# Altium PCB Layout.PcbDoc
Units mil, origin at the board's own origin, x right, y up, seen from the top; angles counter-clockwise.
Board outline 1780 x 2630 mil, 2 copper layers (Top Layer, Bottom Layer); 36 components, 22 nets, 112 pads, 25 vias.
Unrouted connection lines stored in the file: 1.
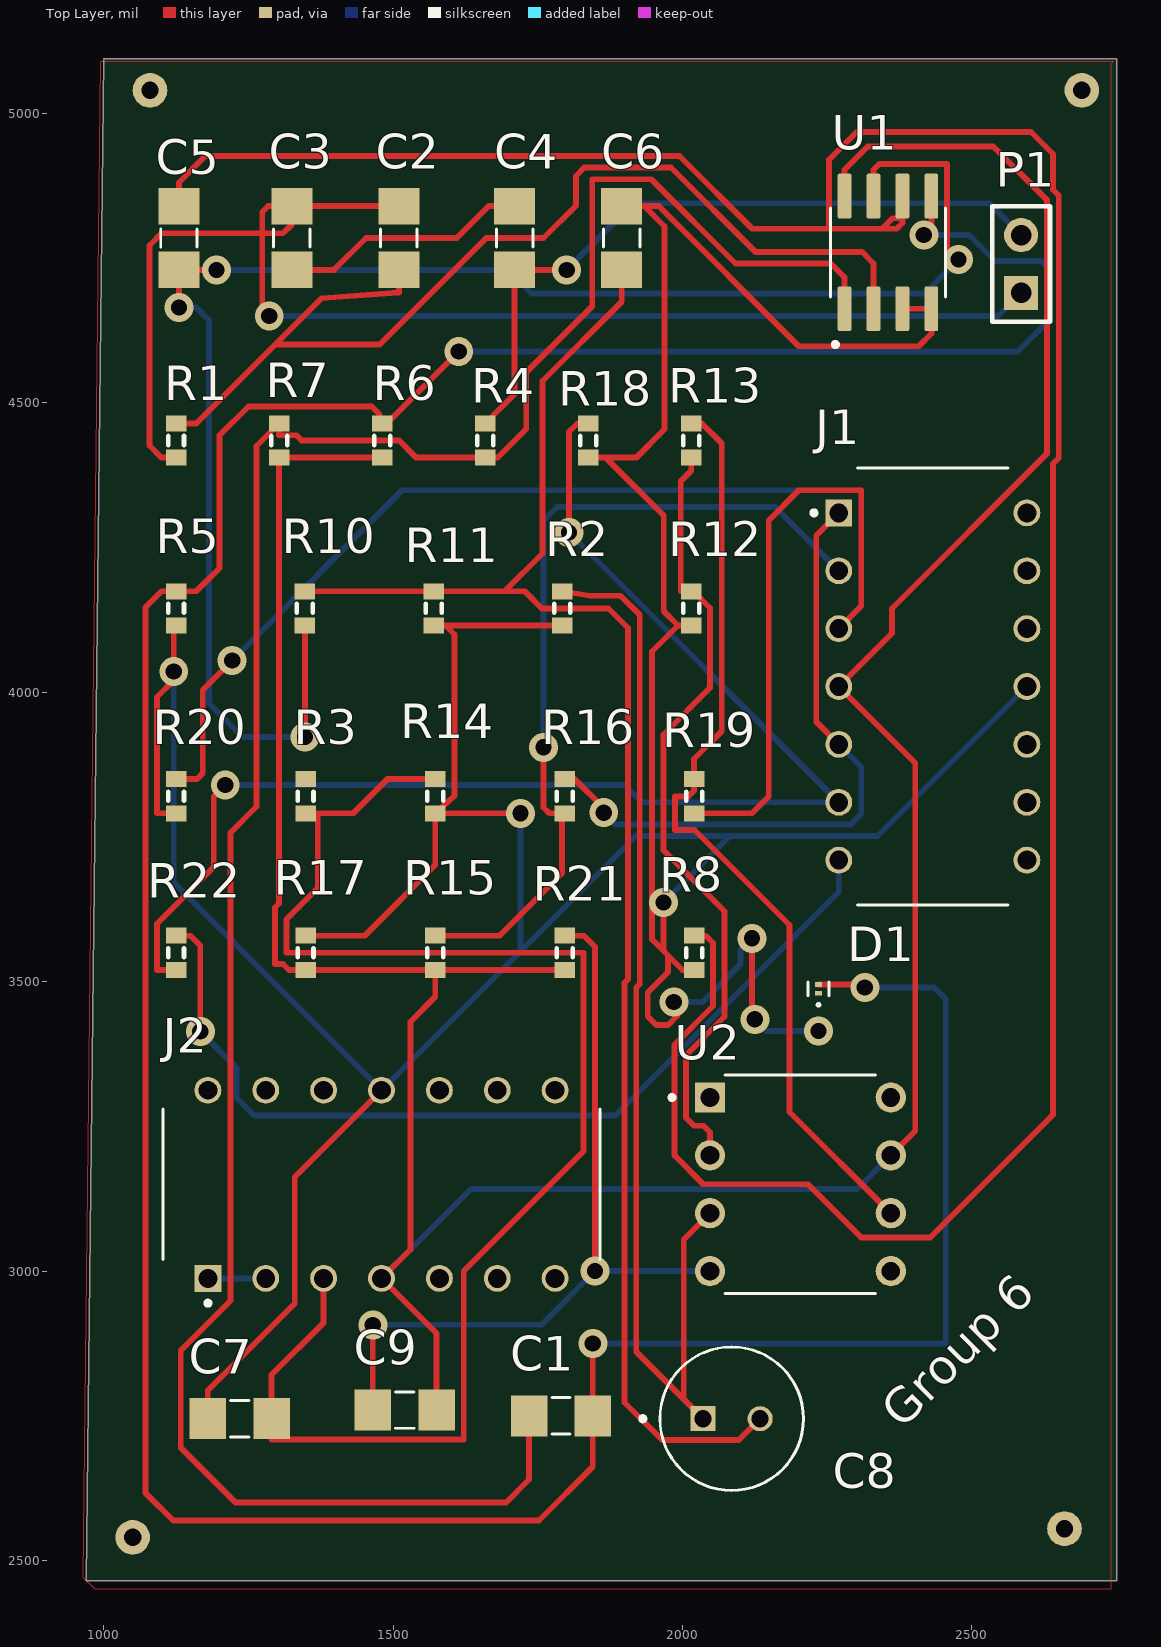
[diagram p0: Top Layer view]
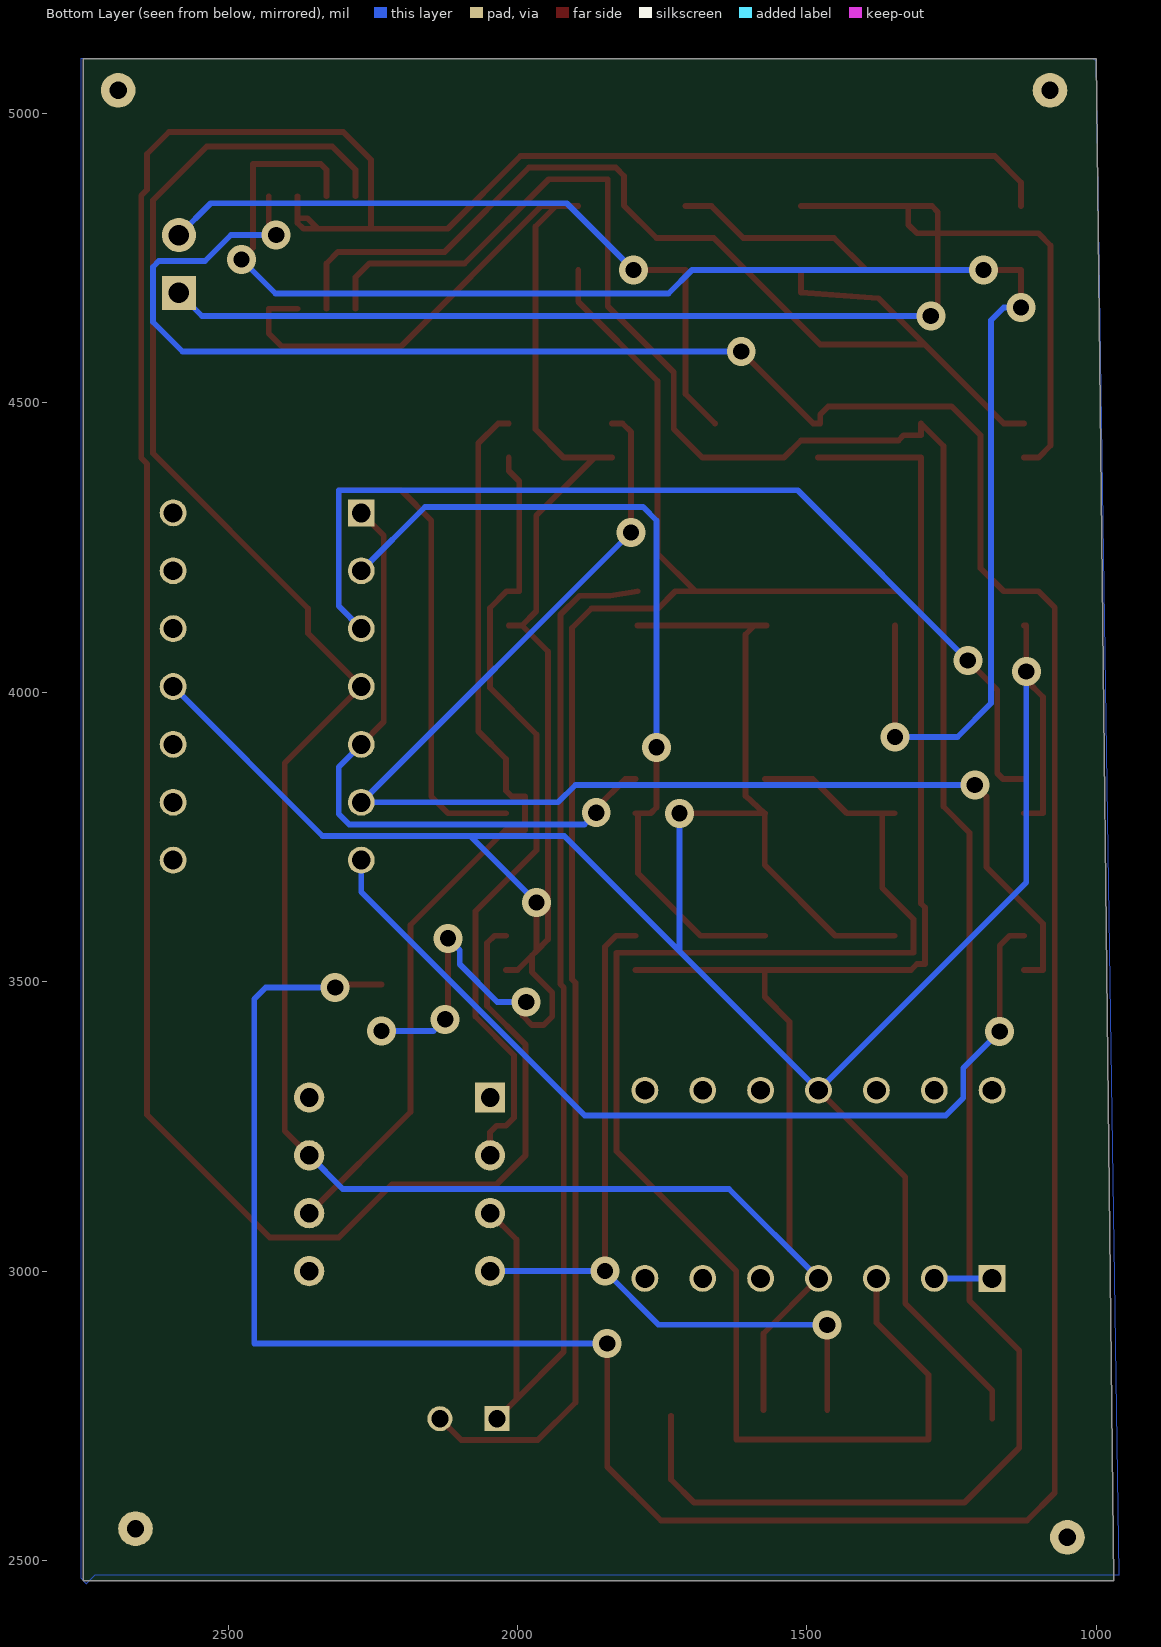
[diagram p1: Bottom Layer view, seen from below]

## Layer stack, top to bottom
Top Solder: solder mask 0.4, Solder Resist, Dk 3.5
Top Layer: signal copper 1.4
Dielectric 1: dielectric 12.6, FR-4, Dk 4.8
Bottom Layer: signal copper 1.4
Bottom Solder: solder mask 0.4, Solder Resist, Dk 3.5

## Board outline
970,2465 2750,2465 2750,5095 1000,5095

## Design rules (kind name [scope] priority, off if disabled: settings)
Clearance [All] p1: gap=10 ignorepadtopadclearanceinfootprint=FALSE except(0: Arc-Hole Track-Hole SMDPad-Hole THPad-Hole Via-Hole Fill-Hole Poly-Hole Region-Hole Text-Hole)
PolygonConnect [All] p1: connectstyle=Relief reliefconductorwidth=10 reliefentries=4 polygonreliefangle="90 Angle" airgapwidth=10
RoomDefinition Schematic [InComponentClass('Schematic')] p1: confinementstyle=ConfineIn formatcopy=TRUE lockcomponents=FALSE outline 1050,60 7020,60 7020,950 1050,950
RoutingVias [All] p1: holewidth=28 width=50 viastyle="Through Hole" minholewidth=28 minwidth=50 maxholewidth=28 maxwidth=50
SolderMaskExpansion [All] p1: expansion=4
Width [All] p1: maxlimit=10 minlimit=10 preferedwidth=10
30 further rules are at their usual default settings.

## Components (designator, comment, footprint, x,y, rotation, side; value= is the part's Value field where it differs from the comment)
C1 "30pF" CAPC3216X190 1790,2750 r180 top
C2 "0.05uF" CAPC3216X190 1510,4785 r90 top
C3 "1uF" CAPC3216X190 1325,4785 r90 top
C4 "1uF" CAPC3216X190 1710,4785 r90 top
C5 "30pF" CAPC3216X190 1130,4785 r90 top
C6 "100pF" CAPC3216X190 1895,4785 r90 top
C7 "100pF" CAPC3216X190 1235,2745 r180 top
C8 "*" CAPPRD250W50D630H1120 2085,2745 r0 top
C9 "1uF" CAPC3216X190 1520.12,2760 r180 top
D1 "1N4148" DIODFN60X30X36-2N 2235,3487.52 r90 top
J1 "LM324N/NOPB" DIP825W47P254L1917H533Q14 2432.5,4010 r0 top
J2 "LM324N/NOPB" DIP825W47P254L1917H533Q14 1480,3150 r90 top
P1 "Header 2" HDR1X2 2585,4690 r90 top
R1 "" J1-0603 1125,4435 r90 top value=33K
R2 "" J1-0603 1792.5,4145 r90 top value=1M
R3 "" J1-0603 1348.75,3820.47 r90 top value=100k
R4 "" J1-0603 1659,4435 r90 top value=2,2k
R5 "" J1-0603 1125,4145 r90 top value=4.7k
R6 "47k" J1-0603 1481,4435 r90 top value=1K
R7 "" J1-0603 1303,4435 r90 top value=3.3k
R8 "" J1-0603 2020,3550 r90 top value=20k
R10 "" J1-0603 1347.5,4145 r90 top value=10k
R11 "" J1-0603 1570,4145 r90 top value=100k
R12 "" J1-0603 2015,4145 r90 top value=47k
R13 "" J1-0603 2015,4435 r90 top value=1M
R14 "" J1-0603 1572.5,3820.47 r90 top value=20k
R15 "" J1-0603 1572.5,3550 r90 top value=150k
R16 "" J1-0603 1796.25,3820.47 r90 top value=130k
R17 "" J1-0603 1348.75,3550 r90 top value=1.5k
R18 "" J1-0603 1837,4435 r90 top value=2.7K
R19 "" J1-0603 2020,3820.47 r90 top value=100k
R20 "" J1-0603 1125,3820.47 r90 top value=1K
R21 "" J1-0603 1796.25,3550 r90 top value=20k
R22 "" J1-0603 1125,3550 r90 top value=100k
U1 "LM393DG" SOIC127P599X175-8N 2355,4760 r90 top
U2 "LM308N" DIP794W45P254L1016H533Q8 2203.7,3150 r0 top

## Footprints (in the part's own frame and the unit in brackets; to place one, negate y for a bottom-side part, rotate by r counter-clockwise, add the part's x,y. Pads: shape width x height; smd on the part's side, far side on the other; paste and mask are expansions set on the pad)
CAPC3216X190 [mm]
  rect 1.6x1.8 smd: 1(-1.4,0) 2(1.4,0)
  silkscreen extent -0.4,-0.8 0.4,0.8, body extent -1.6,-0.8 1.6,0.8, height 1.5
CAPPRD250W50D630H1120 [mm]
  round 1.1 hole 0.75: N(1.25,0)
  rect 1.1x1.1 hole 0.75: P(-1.25,0)
  silkscreen extent -4,-3.15 3.15,3.15, body extent -3.15,-3.15 3.15,3.15, height 11.2
DIODFN60X30X36-2N [mm]
  rect 0.21x0.29 smd: A(0.19,0) C(-0.19,0)
  silkscreen extent -0.75,-0.46 0.3,0.46
DIP794W45P254L1016H533Q8 [mm]
  rect 1.328x1.328 hole 0.82: 1(-3.97,3.81)
  round 1.328 hole 0.82: 2(-3.97,1.27) 3(-3.97,-1.27) 4(-3.97,-3.81) 5(3.97,-3.81) 6(3.97,-1.27) 7(3.97,1.27) 8(3.97,3.81)
  silkscreen extent -5.73,-4.8 3.3,4.8, body extent -4.79,-5.46 4.79,5.46, height 5.33
DIP825W47P254L1917H533Q14 [mm]
  rect 1.18x1.18 / inner round 1.18 / far side rect 1.18x1.18 hole 0.83: 1(-4.127,7.62)
  round 1.18 hole 0.83: 2(-4.127,5.08) 3(-4.127,2.54) 4(-4.127,0) 5(-4.127,-2.54) 6(-4.127,-5.08) 7(-4.127,-7.62) 8(4.127,-7.62) 9(4.127,-5.08) 10(4.127,-2.54) 11(4.127,0) 12(4.127,2.54) 13(4.127,5.08) 14(4.127,7.62)
  silkscreen extent -5.32,-9.59 3.3,9.59, body extent -4.1,-9.65 4.1,9.65, height 5.08
HDR1X2 [mm] "Connector; Header; 2 Position"
  rect 1.5x1.5 hole 0.9: 1(0,0)
  round 1.5 hole 0.9: 2(2.54,0)
  silkscreen extent -1.27,-1.27 3.81,1.27
J1-0603 [mm] "Chip Resistor, Body 1.6x0.8mm, IPC High Density"
  rect 0.7x0.9 smd: 1(-0.75,0) 2(0.75,0)
  silkscreen extent -0.2,-0.35 0.2,0.35, body extent -0.85,-0.48 0.85,0.48, height 0.9
SOIC127P599X175-8N [mm]
  rrect25% 1.97x0.6 smd: 1(-2.47,1.905) 2(-2.47,0.635) 3(-2.47,-0.635) 4(-2.47,-1.905) 5(2.47,-1.905) 6(2.47,-0.635) 7(2.47,0.635) 8(2.47,1.905)
  silkscreen extent -4.14,-2.53 1.95,2.53, body extent -3,-2.45 3,2.45, height 1.75

## Part data
C1 C2 C3 C4 C5 C6 C7 C9: library part GRM31CC80E157ME11K, "Керамический конденсатор", Package="1206 Murata", Availability="In Stock", Check_prices=https://www.snapeda.com/parts/GRM31CC80E157ME11K/Murata/view-part/?ref=eda, MF=Murata, MP=GRM31CC80E157ME11K, Price=None, Purchase-URL=https://pricing.snapeda.com/search/part/GRM31CC80E157ME11K/?ref=eda, SnapEDA_Link=https://www.snapeda.com/parts/GRM31CC80E157ME11K/Murata/view-part/?ref=snap
C8: library part ECA1JM330I, "CAP ALUM 33UF 20% 63V RADIAL", Package="RADIAL-2 Panasonic", Availability="In Stock", Check_prices=https://www.snapeda.com/parts/ECA1JM330I/Panasonic/view-part/?ref=eda, MF=Panasonic, MP=ECA1JM330I, Price=None, Purchase-URL=https://pricing.snapeda.com/search/part/ECA1JM330I/?ref=eda, SnapEDA_Link=https://www.snapeda.com/parts/ECA1JM330I/Panasonic/view-part/?ref=snap
D1: library part RB520ZS-30T2R, "Diode Schottky 30V 100mA Surface Mount GMD2", Package="0201 Rohm", Availability=Warning, DigiKey-Purchase-URL=https://snapeda.com/shop?store=DigiKey&id=119018, MF=Rohm, Mouser-Purchase-URL=https://snapeda.com/shop?store=Mouser&id=119018, MP=RB520ZS-30T2R, Price=None, SnapEDA_Link=https://www.snapeda.com/parts/RB520ZS-30T2R/Rohm/view-part/119018/?ref=snap
J1 J2: "Quad, 30-V, 1.2-MHz operational amplifier", Package="PDIP-14 Texas Instruments", Availability="In Stock", Check_prices=https://www.snapeda.com/parts/LM324N/Texas+Instruments/view-part/?ref=eda, MF="Texas Instruments", MP=LM324N, Price=None, Purchase-URL=https://pricing.snapeda.com/search/part/LM324N/?ref=eda, SnapEDA_Link=https://www.snapeda.com/parts/LM324N/Texas+Instruments/view-part/?ref=snap
P1: "Header, 2-Pin", LatestRevisionDate=17-Jul-2002, LatestRevisionNote="Re-released for DXP Platform.", Publisher="Altium Limited"
R1 R2 R3 R4 R5 R6 R7 R8 R10 R11 R12 R13 R14 R15 R16 R17 R18 R19 R20 R21 R22: library part Res3, "Resistor", LatestRevisionDate=29-May-2009, LatestRevisionNote="IPC-7351 Footprint Added.", PackageDescription="Chip Resistor", PackageReference=J1-0603, Published=8-Jun-2000, Publisher="Altium Limited"
U1: "Comparator General Purpose CMOS, DTL, ECL, MOS, Open-Collector, TTL 8-SOIC", Package="SOIC-8 ON Semiconductor", Availability="In Stock", Check_prices=https://www.snapeda.com/parts/LM393DG/Onsemi/view-part/?ref=eda, MF="ON Semiconductor", MP=LM393DG, Price=None, Purchase-URL=https://pricing.snapeda.com/search/part/LM393DG/?ref=eda, SnapEDA_Link=https://www.snapeda.com/parts/LM393DG/Onsemi/view-part/?ref=snap
U2: Package=None, Availability=Unavailable, MP=LM308N, Price=None

## Free pads (board coordinates)
  round 60 hole 30: 2(2660,2555) 4(1080,5040) 5(1050,2540) 6(2690,5040)

## Via types
v1: diameter 50, hole 28, Top Layer to Bottom Layer, 25 vias

## Nets (pads, with @x,y where several pads share a name; then routed paths per layer and width w, separated by ;. In a path a pad name is that pad's centre, name@x,y a point inside that pad or via, vN(x,y) a via of type N, cw(c..) or ccw(c..) an arc to the next point about the centre after c; other vN are vias at no path point)
-VCC: C9.2 R21.2 U2.4 | length 1388.7
  Top Layer w10: C9.2 v1(1465,2907) ; R21.2 1830,3579.53 1849,3560.53 v1(1849,3000)
  Bottom Layer w10: v1(1465,2907) 1757,2908 v1(1849,3000) U2.4
GND: C6.2 C7.2 D1.C J1.11 J2.11 R2.1 R5.1 R8.1 R11.1 R12.1 R14.1 R17.2 R18.1 R20.1 U1.3 U1.4 | length 7881.3
  Top Layer w10: R20.1 1092,3790.94 1092,3992 1121,4021 v1(1121,4036) 1121,4115.47 R5.1 ; C7.2 1179.88,2793.88 1330,2944 1330,3162.5 J2.11 ; R17.2 1451,3579.53 1573,3701.53 R14.1@1573,3790.94 ; R11.1 1590.53,4115.47 ; R14.1 R14.1@1573,3790.94 ; v1(1720,3790.94) R14.1@1573,3790.94 ; R2.1 1590.53,4115.47 ; R18.1 1867.53,4405.47 ; C6.2 1933.75,4840.12 ; v1(1967,3637) 1967,3553.47 ; v1(1985,3465) 1991.44,3458.56 1991.44,3441.44 1975,3425 1955,3425 1940,3440 1940,3481.57 1975,3516.57 1975,3545.47 ; R12.1 1992.06,4115.47 ; R8.1 2000,3520.47 1975,3545.47 ; v1(2120,3575) 2120,3440 v1(2125,3435) ; U1.3 U1.4 2430,4620 2408,4598 2201,4598 1958.88,4840.12 1933.75,4840.12 ; R14.1@1573,3790.94 1606,3821 1606,4100 1590.53,4115.47 ; 1867.53,4405.47 1920,4405.47 1969,4454.47 1969,4804.86 1933.75,4840.12 ; 1867.53,4405.47 1967.53,4305.47 1967.53,4140 1992.06,4115.47 ; 1967,3553.47 1975,3545.47 ; 1967,3553.47 1947.28,3573.19 1947.28,4070.7 1992.06,4115.47
  Bottom Layer w10: v1(1121,4036) 1121,3671.5 J2.11 1720,3552.5 ; v1(1720,3790.94) 1720,3552.5 ; v1(1967,3637) 2081.77,3751.77 ; v1(1985,3465) 2035,3465 2100,3530 2100,3555 v1(2120,3575) ; v1(2125,3435) 2145,3415 v1(2235,3415) ; J1.11 2336.77,3751.77 2081.77,3751.77 ; 1720,3552.5 1919.27,3751.77 2081.77,3751.77
NetC1_1: C1.1 D1.A R5.2 R6.2 U1.5 | length 6342.8
  Top Layer w10: v1(1613.47,4589) 1489,4464.53 R6.2 1477,4464.53 1477,4480 1463,4494 1250,4494 1200,4444 1200,4214.53 1160,4174.53 R5.2 1100,4174.53 1072,4146.53 1072,2617 1120,2569 1752,2569 1845.12,2662.12 C1.1 v1(1845.12,2874.88) ; D1.A 2310,3495 v1(2315,3490) ; v1(2417,4790) 2430,4803 U1.5
  Bottom Layer w10: v1(1613.47,4589) 2579,4589 2630,4640 2630,4735 2620,4745 2540,4745 2495,4790 v1(2417,4790) ; v1(1845.12,2874.88) 2454.88,2874.88 2454.88,3470.12 2435,3490 v1(2315,3490)
NetC1_2: C1.2 R4.1 R7.2 U1.1 | length 4131.1
  Top Layer w10: C1.2 1734.88,2640 1694.88,2600 1228,2600 1133,2695 1133,2863 1219,2949 1219,3757.55 1264,3802.55 1264,4425.53 R7.2 1303,4444 1333,4444 1342,4435 1510.47,4435 1540,4405.47 R4.1 1680.47,4405.47 1730,4455 1730,4553 1844,4667 1844,4886.62 1946,4886.62 2091.62,4741 2256,4741 2280,4717 U1.1
NetC2_1: C2.1 R1.2 U1.2 | length 1851
  Top Layer w10: R1.2 1160,4464.53 1296.47,4601 ; C2.1 1510,4691 1376.47,4681 1296.47,4601 ; U1.2 2330,4741 2310,4761 2125.62,4761 1980,4906.62 1830.19,4906.62 1815.86,4892.29 1815.86,4840.86 1760,4785 1661,4785 1477,4601 1296.47,4601
NetC2_2: C2.2 C3.2 P1.1 R1.1 | length 2434
  Top Layer w10: R1.1 1100,4405.47 1079,4426.47 1079,4772 1100,4793 1274,4793 ; v1(1286,4650) 1274,4662 1274,4793 ; C2.2 C3.2 ; 1274,4793 1310,4793 1325,4808 C3.2 ; 1274,4793 1274,4830 1284.12,4840.12 C3.2
  Bottom Layer w10: v1(1286,4650) 2545,4650 P1.1
NetC3_1: C3.1 C4.2 | length 430.7
  Top Layer w10: C3.1 1398,4729.88 1453.12,4785 1610,4785 1665.12,4840.12 C4.2
NetC4_1: C4.1 P1.2 R4.2 | length 1231.9
  Top Layer w10: R4.2 1710,4515.53 C4.1 v1(1799.88,4729.88)
  Bottom Layer w10: v1(1799.88,4729.88) 1915,4845 2530,4845 P1.2
NetC5_1: C5.1 R10.1 U1.7 | length 2909.5
  Top Layer w10: v1(1130,4665) C5.1 v1(1194.88,4729.88) ; R10.1 1348,4115.47 v1(1348,3923) ; U1.7 2330,4903 2340,4913 2457,4913 2457,4768 v1(2477,4748)
  Bottom Layer w10: v1(1130,4665) 1160,4665 1182,4643 1182,3981 1240,3923 v1(1348,3923) ; v1(1194.88,4729.88) 1698.12,4729.88 1739,4689 2418,4689 v1(2477,4748)
NetC5_2: C5.2 R8.2 U1.6 | length 4897.6
  Top Layer w10: C5.2 1130,4881 1175.62,4926.62 1994.91,4926.62 2120.53,4801 2253,4801 ; R8.2 2040,3579.53 2052.72,3566.81 2052.72,3458 1986,3391.28 1986,3200 2036,3150 2217,3150 2309,3058 2428,3058 2640,3270 2640,4394.72 2650,4404.72 2650,4858.28 2640,4868.28 2640,4930 2602,4968 2301,4968 2253,4920 2253,4801 ; U1.6 U1.6@2380,4819 ; 2253,4801 2345,4801 ; 2345,4801 2370,4801 2380,4811 U1.6@2380,4819 ; 2345,4801 2363,4819 U1.6@2380,4819
NetC6_1: C6.1 C8.N R10.2 R11.2 | length 2841
  Top Layer w10: R10.2 R11.2 1692.53,4174.53 ; C6.1 1895,4675 1758,4538 1758,4240 1692.53,4174.53 ; C8.N 2097.21,2708 1965,2708 1900,2773 1900,3498.14 1906,3504.14 1906,4111 1872,4145 1757,4145 1727.47,4174.53 1692.53,4174.53
NetC7_1: C7.1 J2.3 R3.1 R14.2 | length 2598.8
  Top Layer w10: R3.1 1370,3790.94 ; J2.3 1380,2910.88 1290.12,2821 C7.1 1290.12,2709 1622,2709 1622,3000 1829,3207 1829,3550 1316.03,3550 1316.03,3608 1370,3661.97 1370,3790.94 ; R14.2 1490.06,3850 1431,3790.94 1370,3790.94
NetC8_P: C8.P R2.2 U2.3 | length 1927.2
  Top Layer w10: R2.2 1840,4167 1893,4167 1926,4134 1926,3495.85 1920,3489.85 1920,2860.79 2002,2778.79 ; C8.P 2002,2778.79 ; U2.3 2002,3054.6 2002,2778.79
NetJ1_1: J1.1 J1.5 R16.2 | length 1125.9
  Top Layer w10: R16.2 1814,3850 1864,3800 v1(1864,3792) ; J1.5 2231,3949 2231,4271 J1.1
  Bottom Layer w10: v1(1864,3792) 1884.23,3771.77 2290.77,3771.77 2309,3790 2309,3871 J1.5
NetJ1_2: J1.2 R15.2 R16.1 | length 1469.2
  Top Layer w10: R15.2 1684,3579.53 1792,3687.53 R16.1@1792,3790.94 ; v1(1760,3905) 1760,3800.94 1770,3790.94 R16.1@1792,3790.94 ; R16.1 R16.1@1792,3790.94
  Bottom Layer w10: v1(1760,3905) 1760,4297 1783,4320 2160,4320 J1.2
NetJ1_3: J1.3 R19.1 R20.2 | length 2785
  Top Layer w10: R20.2 1161,3850 1171,3860 1171,4004 v1(1222,4055) ; R19.1 2120,3790.94 2149,3819.94 2149,4297 2201,4349 2309,4349 2309,4149 J1.3
  Bottom Layer w10: v1(1222,4055) 1516,4349 2309,4349 2309,4149 J1.3
NetJ1_6: J1.6 R18.2 R22.1 | length 2345.9
  Top Layer w10: R22.1 1092,3520.47 1092,3600 1190,3698 1190,3820 v1(1210,3840) ; v1(1804,4276) 1804,4450 1818.53,4464.53 R18.2
  Bottom Layer w10: v1(1210,3840) 1900,3840 1930,3810 J1.6 v1(1804,4276)
NetJ1_7: J1.7 R22.2 | length 1606
  Top Layer w10: R22.2 1150,3579.53 1167,3562.53 v1(1167,3414)
  Bottom Layer w10: v1(1167,3414) 1230,3351 1230,3299 1260,3269 1884,3269 2270,3655 J1.7
NetJ2_1: J2.1 J2.2 | length 100
  Bottom Layer w10: J2.1 J2.2
NetR12_2: R12.2 R13.1 U2.2 | length 1378.3
  Top Layer w10: R13.1 2015,4382.87 1996.97,4364.84 1996.97,4174.53 R12.2 2019,4174.53 2047.72,4145.81 2047.72,4007.72 1967.28,3927.28 1967.28,3727.12 2072.72,3621.68 2072.72,3439.72 2006,3373 2006,3265 2020,3251 2036.4,3251 2047.4,3240 U2.2
NetR13_2: R13.2 R19.2 U2.6 | length 1617.9
  Top Layer w10: R13.2 2033.47,4464.53 2067.72,4430.28 2067.72,3932.7 2020,3884.98 R19.2 2020,3830 2010,3820 1987.28,3820 1987.28,3762.16 2020.84,3762.16 2185,3598 2185,3275 U2.6
VCC: C9.1 J1.4 J2.4 R6.1 R7.1 R15.1 R17.1 R21.1 U1.8 U2.7 | length 5688.6
  Top Layer w10: R6.1 R7.1 1303,3635.28 1296.03,3628.31 1296.03,3530.75 1309.73,3530.75 1320,3520.47 R17.1 R15.1 R15.1@1573,3520.47 ; C9.1 1575.24,2892.26 J2.4 1530,3037.5 1530,3431 1573,3474 R15.1@1573,3520.47 ; R21.1 R15.1@1573,3520.47 ; U1.8 2280,4903 2320,4943 2537,4943 2630,4850 2630,4413 2362,4145 2362,4102 J1.4 2402,3878 2402,3242 U2.7
  Bottom Layer w10: J2.4 1634.5,3142 2302,3142 U2.7
pads on no net: J1.8 J1.9 J1.10 J1.12 J1.13 J1.14 J2.5 J2.6 J2.7 J2.8 J2.9 J2.10 J2.12 J2.13 J2.14 R3.2 U2.1 U2.5 U2.8

## Polygon pours and split planes (outlines as drawn)
no net on Top Layer "Top Layer-No Net" (none, pour order 2): 995,5090 2745,5090 2740,5085 2740,2450 985,2450 965,2470
no net on Bottom Layer "Top Layer-No Net" (none, pour order 4): 1000,5090 1005,5095 2755,5095 2755,2470 2745,2460 2730,2475 960,2475

## Silkscreen, mask and mechanical layers (free items; w line width, h text height)
Top Overlay:
  text "Group 6" at 2380,2725 h60 r45